# EAGLE board V-00349-02 (EAGLE 7.2.0)

Size 160 x 100 mm. Coordinates in mm from the lower left corner, seen from the top.
Outline: 0,0 160,0 160,100 0,100 0,0
Copper layers (1*16): Top 0.035mm / dielectric 1.5mm / Bottom 0.035mm
Design rules "default": minimum track width 10mil, minimum drill 24mil, track to track 8mil, track to pad 8mil, pad to pad 8mil, via to via 8mil, smd to smd 8mil, copper to edge 40mil, drill to drill 8mil, minimum pad ring 10mil, minimum via ring 8mil, stop-mask expansion 4mil, vias tented up to drill 0mil, thermal gap 10mil

## Footprints (pad centres in the part's own frame; a part is rotated, then mirrored left to right if it is on the bottom)
PSH02-04P = drill 1.016 pad 1.422 long: 1 3.81,0; 2 1.27,0; 3 -1.27,0; 4 -3.81,0
PSH02-06P = drill 1.016 pad 1.422 long: 1 6.35,0; 2 3.81,0; 3 1.27,0; 4 -1.27,0; 5 -3.81,0; 6 -6.35,0
H2M09ST = drill 1.092: 1 -5.537,1.422; 2 -2.769,1.422; 3 0,1.422; 4 2.769,1.422; 5 5.537,1.422; 6 -4.153,-1.422; 7 -1.384,-1.422; 8 1.384,-1.422; 9 4.153,-1.422 | hole 3.048: -12.497,0; 12.497,0
H2M15ST = drill 1.092: 1 -9.69,1.422; 2 -6.921,1.422; 3 -4.153,1.422; 4 -1.384,1.422; 5 1.384,1.422; 6 4.153,1.422; 7 6.921,1.422; 8 9.69,1.422; 9 -8.306,-1.422; 10 -5.537,-1.422; 11 -2.769,-1.422; 12 0,-1.422; 13 2.769,-1.422; 14 5.537,-1.422; 15 8.306,-1.422 | hole 3.048: -16.662,0; 16.662,0

## Placement (x,y rotation side)
K1  I-0004  [PSH02-04P]  -35.56,30.48 0 top  (outside the outline)
K2  I-0003  [PSH02-04P]  -19.05,36.83 0 top  (outside the outline)
K3  I-0001  [PSH02-04P]  -30.48,36.83 0 top  (outside the outline)
K4  I-0002  [PSH02-06P]  -21.59,30.48 0 top  (outside the outline)
X1  D-SUB9-R-002  [H2M09ST]  -29.21,19.05 0 top  (outside the outline)
X2  D-SUB15-R-003  [H2M15ST]  -33.02,6.35 0 top  (outside the outline)

## Library data of the parts
K1-K4 = #PaJa_konektory
X1 X2 = con-thomas-betts; OC_FARNELL: unknown; OC_NEWARK: unknown

## Nets
N$1: K3.1 X1.1
N$2: K3.2 X1.2
N$3: K3.3 X1.3
N$4: K3.4 X1.4
N$5: K4.1 X2.9
N$6: K4.2 X2.12
N$7: K4.3 X2.13
N$8: K4.4 X1.6
N$9: K4.5 X1.7
N$10: K4.6 X2.10
N$11: K1.1 X2.1
N$12: K1.2 X2.2
N$13: K1.3 X2.3
N$14: K1.4 X2.4
N$15: K2.1 X2.5
N$16: K2.2 X2.6
N$17: K2.3 X2.7
N$18: K2.4 X2.8

## Tracks (layer width: path | path; a pad name or v marks a point on that pad's centre or on a via)
N$1  (1 unrouted)
N$2  (1 unrouted)
N$3  (1 unrouted)
N$4  (1 unrouted)
N$5  (1 unrouted)
N$6  (1 unrouted)
N$7  (1 unrouted)
N$8  (1 unrouted)
N$9  (1 unrouted)
N$10  (1 unrouted)
N$11  (1 unrouted)
N$12  (1 unrouted)
N$13  (1 unrouted)
N$14  (1 unrouted)
N$15  (1 unrouted)
N$16  (1 unrouted)
N$17  (1 unrouted)
N$18  (1 unrouted)